# Altium PCB IR_ToF_Module.PcbDoc
Units mm, origin at the board's own origin, x right, y up, seen from the top; angles counter-clockwise.
Board outline 30 x 18.5 mm, 2 copper layers (Top Layer, Bottom Layer); 18 components, 14 nets, 95 pads, 46 vias.
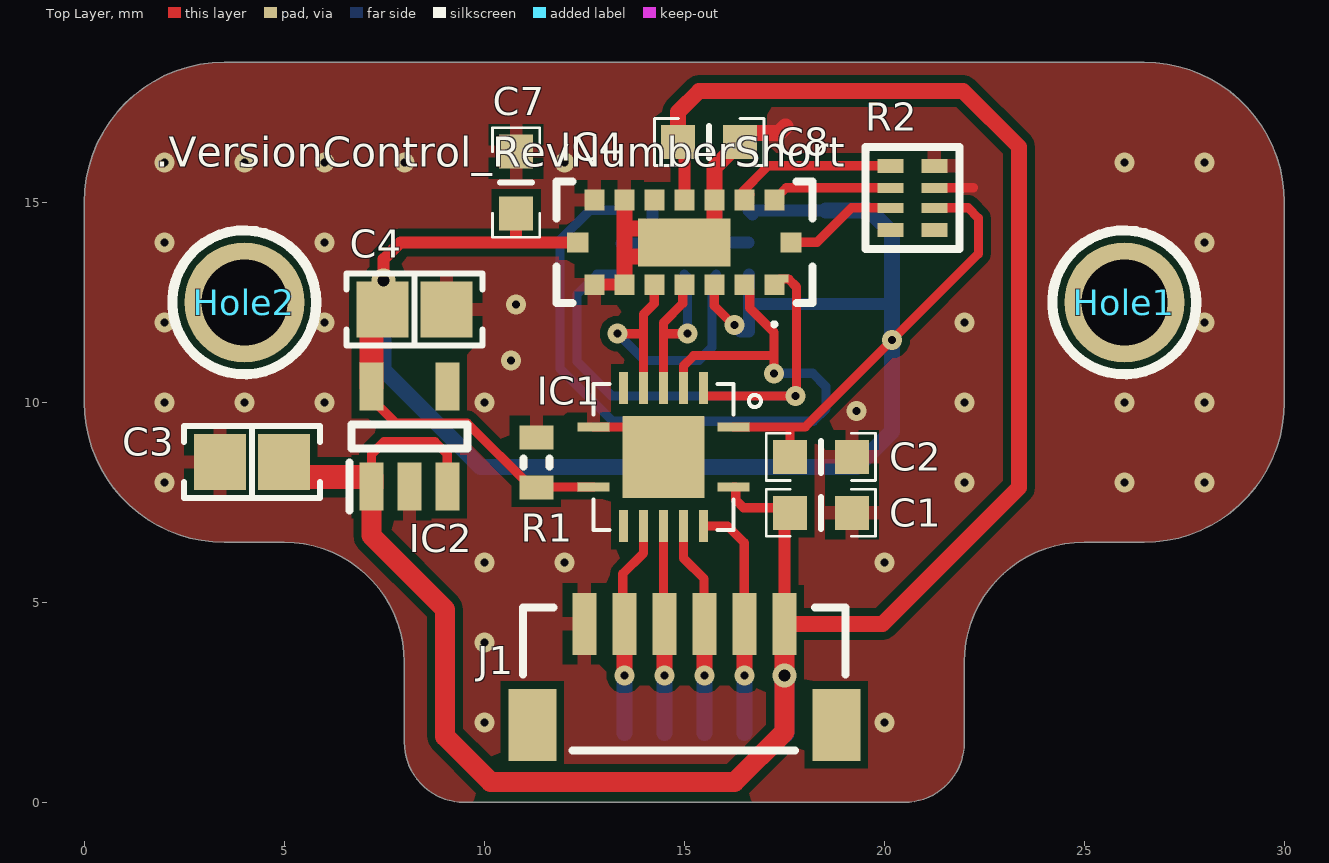
[diagram p0: Top Layer view]
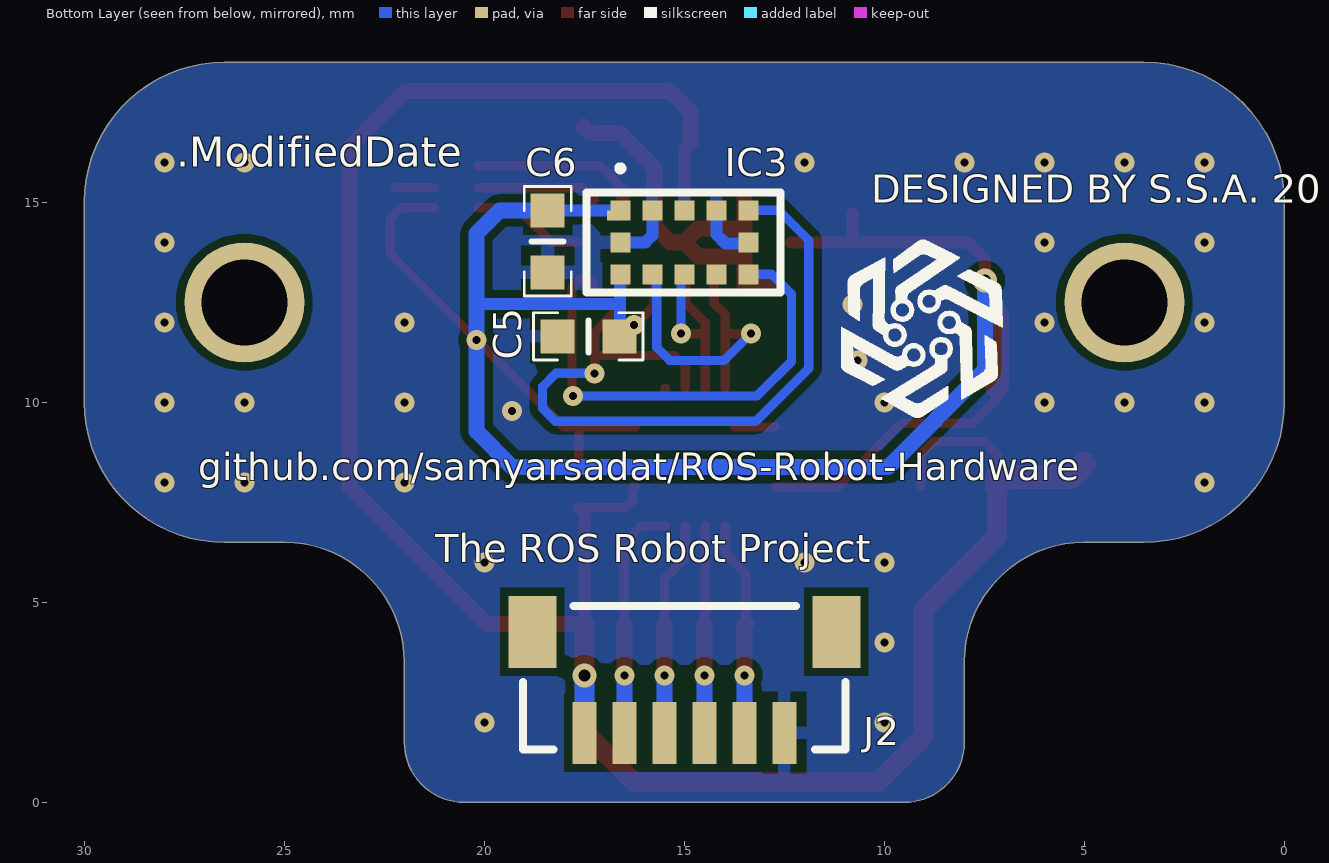
[diagram p1: Bottom Layer view, seen from below]
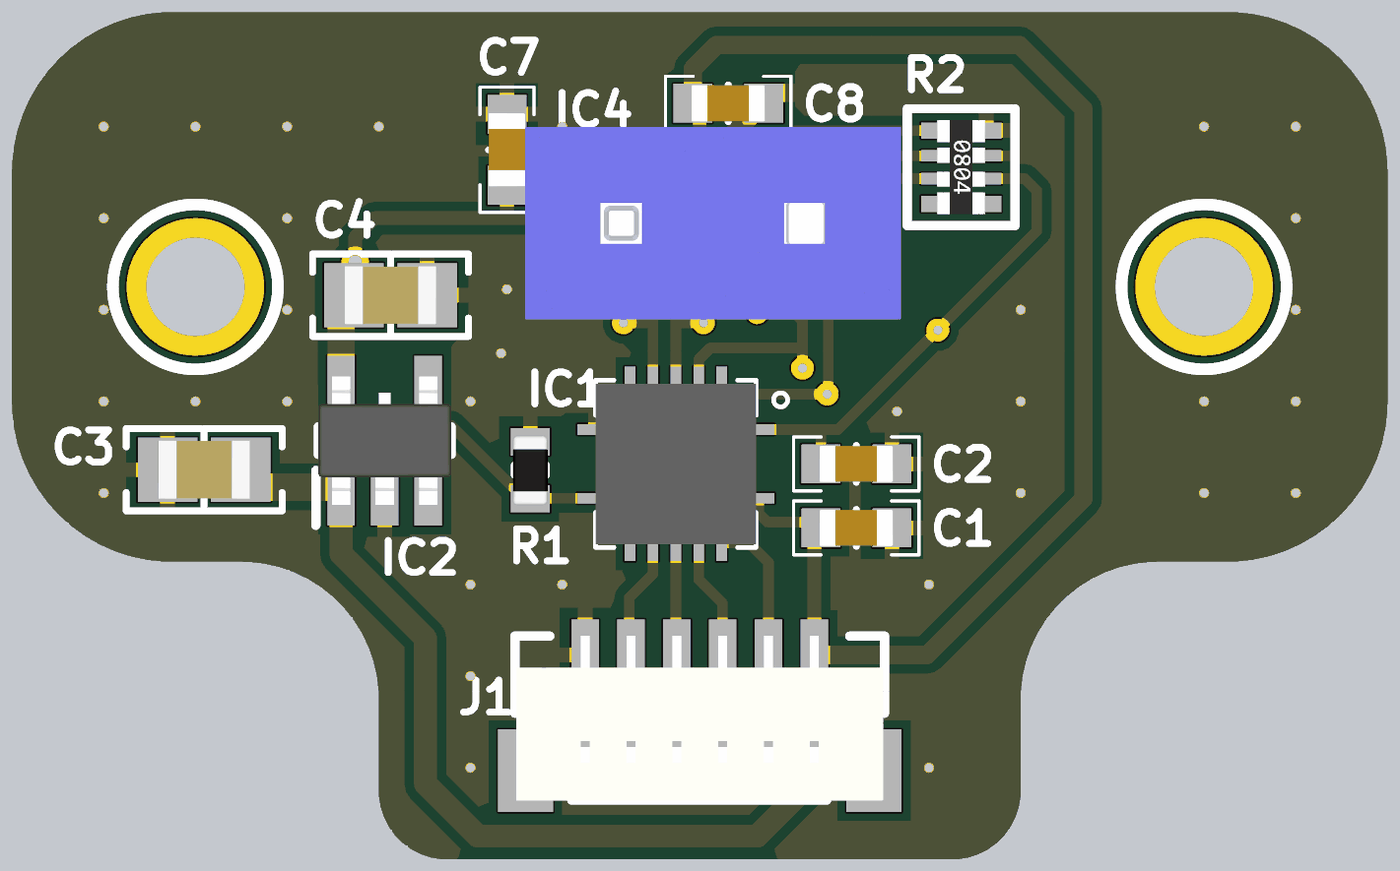
[diagram p2: 3D render of the assembled board from above, using the file's embedded part models]
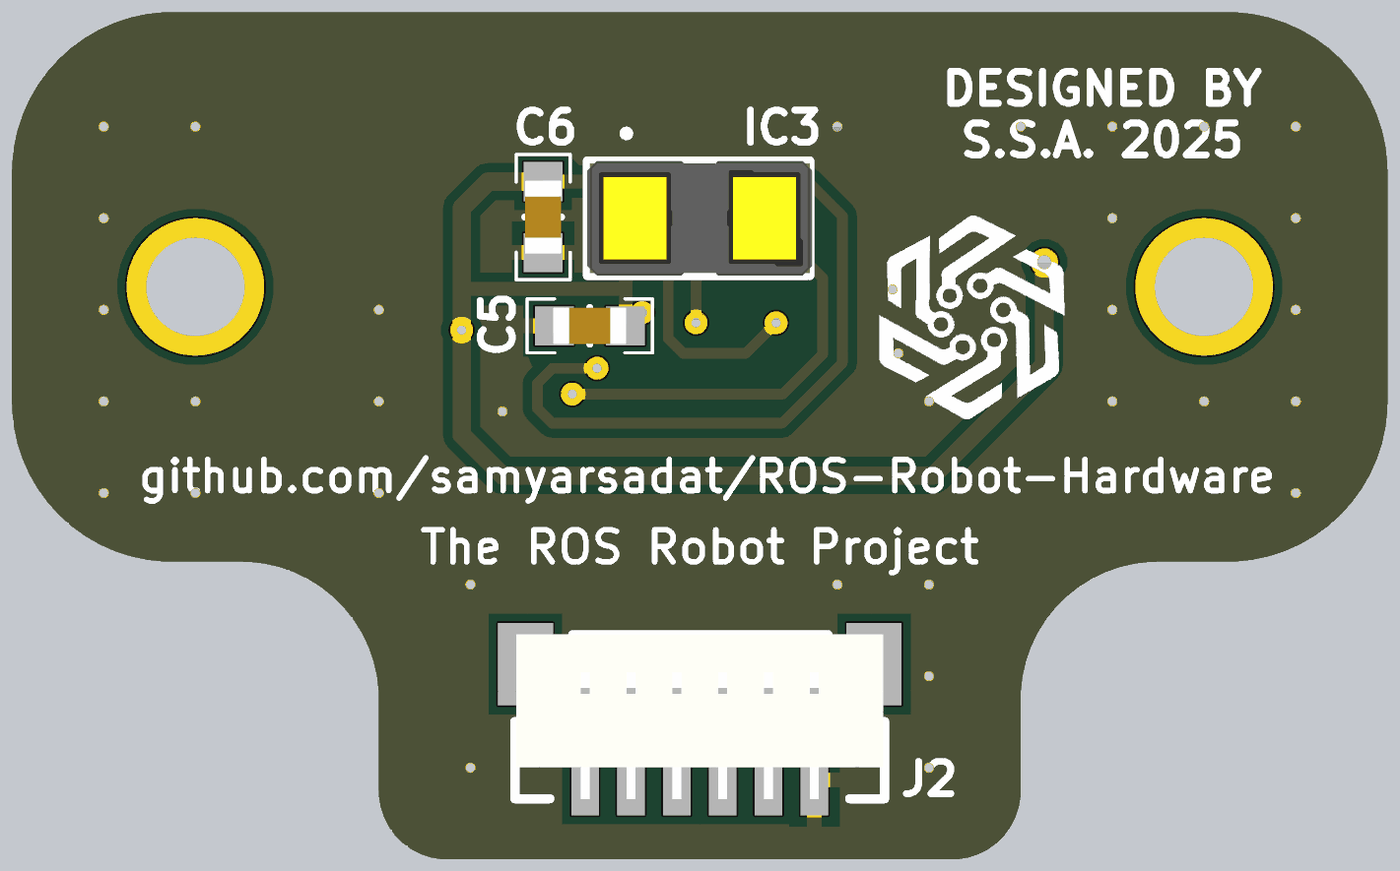
[diagram p3: 3D render of the assembled board from below, using the file's embedded part models]

## Layer stack, top to bottom
Top Solder: solder mask 0.0102, Solder Resist, Dk 3.5
Top Layer: signal copper 0.0356
Dielectric 1: dielectric 0.32, FR-4, Dk 4.8
Bottom Layer: signal copper 0.0356
Bottom Solder: solder mask 0.0102, Solder Resist, Dk 3.5

## Board outline
5,6.5 cw(c5,3.5) 8,3.5 8,1.5 ccw(c9.5,1.5) 9.5,0 20.5,0 ccw(c20.5,1.5) 22,1.5 22,3.5 cw(c25,3.5) 25,6.5 26.5,6.5 ccw(c26.5,10) 30,10 30,15 ccw(c26.5,15) 26.5,18.5 3.5,18.5 ccw(c3.5,15) 0,15 0,10 ccw(c3.5,10) 3.5,6.5

## Design rules (kind name [scope] priority, off if disabled: settings)
BoardOutlineClearance [All] p1: gap=0.2 ignorepadtopadclearanceinfootprint=FALSE except(0: Fill-OutlineEdge Fill-CavityEdge Fill-CutoutEdge Fill-SplitBarrior Fill-SplitContinuation Poly-OutlineEdge Poly-CavityEdge Poly-CutoutEdge Poly-SplitBarrior Poly-SplitContinuation Region-OutlineEdge Region-CavityEdge Region-CutoutEdge Region-SplitBarrior Region-SplitContinuation; 0.15: Text-OutlineEdge Text-CavityEdge Text-CutoutEdge Text-SplitBarrior Text-SplitContinuation)
Clearance "Stitching GND" [IsStitchingVia and InNet('GND') vs (IsVia and (Not IsStitchingVia)) Or IsPad] p1: gap=0.2 ignorepadtopadclearanceinfootprint=FALSE except(0.28: Arc-Hole Track-Hole)
Clearance [All] p2: gap=0.2 ignorepadtopadclearanceinfootprint=FALSE except(0.28: Arc-Hole Track-Hole)
DiffPairsRouting [All] p1: maxlimit=0.254 minlimit=0.254 mostfreqgap=0.254 toplayer_minwidth=0.381 toplayer_maxwidth=0.5 toplayer_prefwidth=0.4 bottomlayer_minwidth=0.381 bottomlayer_maxwidth=0.5 bottomlayer_prefwidth=0.4 maxuncoupledlength=12.7
HoleSize [All] p1: absolutevalues=TRUE maxlimit=6 minlimit=0.15 maxpercent=80.000 minpercent=20.000
HoleToHoleClearance [All] p1: gap=0.2 allowstackedmicrovias=TRUE
MinimumAnnularRing MinimumViaAnnularRing [IsVia] p1: minimumring=0.15
MinimumAnnularRing [All] p2: minimumring=0.2
MinimumSolderMaskSliver [All] p1: minsoldermaskwidth=0.1
PlaneConnect [All] p1: planeconnectstyle=Relief reliefexpansion=0.508 reliefentries=4 reliefconductorwidth=0.32 reliefairgap=0.254
PolygonConnect GNDStitchingDirect [InNet('GND')] p1: thpad.connectstyle=Relief thpad.reliefconductorwidth=0.32 thpad.reliefentries=4 thpad.polygonreliefangle="90 Angle" thpad.airgapwidth=0.254 thpad.conductorbypadedge=TRUE thpad.mindistance=0.381 thpad.enablemindistance=FALSE smdpad.connectstyle=Relief smdpad.reliefconductorwidth=0.32 smdpad.reliefentries=4 smdpad.polygonreliefangle="90 Angle" smdpad.airgapwidth=0.254 smdpad.conductorbypadedge=TRUE smdpad.mindistance=0.381 smdpad.enablemindistance=FALSE via.connectstyle=Direct via.reliefconductorwidth=0.254 via.reliefentries=4 via.polygonreliefangle="90 Angle" via.airgapwidth=0.254
PolygonConnect [All] p2: connectstyle=Relief reliefconductorwidth=0.32 reliefentries=4 polygonreliefangle="90 Angle" conductorbypadedge=TRUE mindistance=0.381 enablemindistance=FALSE airgapwidth=0.254
RoutingVias [All] p1: holewidth=0.4 width=0.8 viastyle="Through Hole" minholewidth=0.2 minwidth=0.5 maxholewidth=0.8 maxwidth=1.5
SilkToSilkClearance [All] p1: silktosilkclearance=0.1
SilkToSolderMaskClearance [IsPad] p1: minsilkscreentomaskgap=0.05 clearancetoexposedcopper=TRUE
SolderMaskExpansion [All] p1: expansion=0.04 istentingtop=FALSE
SupplyNets "Schematic Supply Nets_4" [InNet('+3V3')] p1: voltage=3.300
SupplyNets "Schematic Supply Nets_3" [InNet('+LV8')] p2: voltage=2.800
SupplyNets "Schematic Supply Nets_1" [InNet('GND')] p3: voltage=0.000
UnRoutedNet [All] p1: checkbadconnections=TRUE
Width [All] p1: maxlimit=1.4 minlimit=0.23 preferedwidth=0.3
22 further rules are at their usual default settings.

## Classes and differential pairs
component class VL53L_SZ: C5 C6 IC3
component class VL53L8CX: C7 C8 IC4 R2
component class IR_ToF_Module: C1 C2 C3 C4 Hole1 Hole2 IC1 IC2 J1 J2 R1

## Components (designator, comment, footprint, x,y, rotation, side; value= is the part's Value field where it differs from the comment)
C1 "100nF" CAP_SMD_603 18.415,7.239 r180 top
C2 "100nF" CAP_SMD_603 18.415,8.636 r180 top
C3 "10uF" "CAP 0805_2012" 4.191,8.509 r180 top
C4 "10uF" "CAP 0805_2012" 8.255,12.319 r0 top
C5 "100nF" CAP_SMD_603 17.399,11.65 r180 bottom
C6 "100nF" CAP_SMD_603 18.415,14.024 r270 bottom
C7 "100nF" CAP_SMD_603 10.795,15.494 r90 top
C8 "470nF" CAP_SMD_603 15.621,16.51 r180 top
Hole1 "Hole" Hole_2mm 26,12.5 r0 top locked
Hole2 "Hole" Hole_2mm 4,12.5 r0 top locked
IC1 "TXS0104ERGYR" RGY(S-PVQFN-N14) 14.478,8.636 r180 top
IC2 "TPS7A2028PDBVR" SOT95P280X145-5N 8.128,9.144 r90 top
IC3 "VL53L1X" VL53L1X 15,14 r90 bottom locked
IC4 "VL53L8CXV0GC_1" VL53L8CXV0GC1 15,14 r90 top locked
J1 "BM06B-SRSS-TB(LF)(SN)" "JST BM06B-SRSS-TB" 15,3.2 r180 top locked
J2 "BM06B-SRSS-TB(LF)(SN)" "JST BM06B-SRSS-TB" 15,3 r180 bottom
R1 "47k" RES_0603 11.303,7.874 r90 top
R2 "YC124-JR-0747KL" "RESNET 0804-8 CONVEX" 20.701,15.113 r180 top

## Footprints (in the part's own frame and the unit in brackets; to place one, negate y for a bottom-side part, rotate by r counter-clockwise, add the part's x,y. Pads: shape width x height; smd on the part's side, far side on the other; paste and mask are expansions set on the pad)
"CAP 0805_2012" [mm] "Chip Capacitor, 2-Leads, Body 2.00x1.20mm, IPC Medium Density"
  rect 1.3x1.4 smd: 1(-0.8,0) 2(0.8,0)
  silkscreen extent -1.7,-0.9 1.7,0.9, body extent -1,-0.64 1,0.64, height 1.26
CAP_SMD_603 [mm]
  rect 0.85x0.85 smd: 1(-0.775,0) 2(0.775,0)
  silkscreen extent -1.37,-0.59 1.37,0.59, body extent -0.8,-0.4 0.8,0.4, height 0.9
Hole_2mm [mm]
  round 3 hole 2.15: 1(0,0)
  silkscreen extent -1.8,-1.8 1.8,1.8
"JST BM06B-SRSS-TB" [mm] "1.0mm pitch/Disconnectable Crimp style connector"
  rect 0.6x1.55 smd: 1(-2.5,-1.262) 2(-1.5,-1.262) 3(-0.5,-1.262) 4(0.5,-1.262) 5(1.5,-1.262) 6(2.5,-1.262)
  rect 1.2x1.8 smd: M(-3.8,1.262) M(3.8,1.262)
  silkscreen extent -4.03,-1.68 4.03,1.91, body extent -4,-1.69 4,1.91, height 4.32
RES_0603 [mm]
  rect 0.6x0.85 smd: 1(0,0) 2(1.244,0)
  silkscreen extent 0.52,-0.33 0.72,0.33, body extent -0.14,-0.38 1.38,0.38, height 0.45
"RESNET 0804-8 CONVEX" [mm] "4 resistor 2.0x1.0mm, 0.65mm high"
  rect 0.65x0.35 smd: 1(-0.55,0.8) 4(-0.55,-0.8) 5(0.55,-0.8) 8(0.55,0.8)
  rect 0.65x0.25 smd: 2(-0.55,0.25) 3(-0.55,-0.25) 6(0.55,-0.25) 7(0.55,0.25)
  silkscreen extent -1.17,-1.28 1.17,1.28, body extent -0.53,-1.02 0.53,1.03, height 0.56
RGY(S-PVQFN-N14) [mm]
  rect 0.8x0.23 smd: 1(-1.75,-0.75) 7(1.75,-0.75) 8(1.75,0.75) 14(-1.75,0.75)
  rect 0.23x0.8 smd: 2(-1,-1.725) 3(-0.5,-1.725) 4(0,-1.725) 5(0.5,-1.725) 6(1,-1.725) 9(1,1.725) 10(0.5,1.725) 11(0,1.725) 12(-0.5,1.725) 13(-1,1.725)
  rect 2.05x2.05 smd: 15(0,0)
  silkscreen extent -2.44,-1.83 1.75,1.83, body extent -1.75,-1.75 1.75,1.75, height 0.97
SOT95P280X145-5N [mm]
  rect 1.2x0.6 smd: 1(-1.25,0.95) 2(-1.25,0) 3(-1.25,-0.95) 4(1.25,-0.95) 5(1.25,0.95)
  silkscreen extent -1.85,-1.45 0.3,1.5, body extent -1.4,-1.45 1.4,1.45, height 1.2
VL53L1X [mm]
  rect 0.25x0.08 smd: 1(0.675,1.89)
  rect 0.5x0.5 smd: 1(0.8,1.6) 2(0.8,0.8) 3(0.8,0) 4(0.8,-0.8) 5(0.8,-1.6) 6(0,-1.6) 7(-0.8,-1.6) 8(-0.8,-0.8) 9(-0.8,0) 10(-0.8,0.8) 11(-0.8,1.6) 12(0,1.6)
  silkscreen extent -1.25,-2.4 1.9,2.45, body extent -1.25,-2.45 1.25,2.45, height 1.56
VL53L8CXV0GC1 [mm]
  rect 0.515x0.5 smd: A1(-1.058,-2.25) A2(-1.058,-1.5) A3(-1.058,-0.75) A4(-1.058,0) A5(-1.058,0.75) A6(-1.058,1.5) A7(-1.058,2.25) C1(1.058,-2.25) C2(1.058,-1.5) C3(1.058,-0.75) C4(1.058,0) C5(1.058,0.75) C6(1.058,1.5) C7(1.058,2.25)
  rect 0.2x0.1 smd: A1(-0.9,-2.55)
  rect 0.5x0.535 smd: B1(0,-2.668) B7(0,2.668)
  rect 1.2x2.316 smd: B4(0,0)
  silkscreen extent -2.1,-3.2 1.52,3.2, body extent -2.21,-4.39 1.99,3.81, height 4.75

## Part data
C1 C2 C5 C6 C7 C8: library part "Non-polar Capacitor", "Generic Ceramic Capacitor", Voltage=6.3V
C3 C4: library part CL21A106KOQNNNE, "CAP CER 10UF 16V X5R 0805", Capacitance="10 µF", Device Package="0805 (2012 Metric)", Manufacturer="Samsung Electro-Mechanics", Operating Temperature="-55°C ~ 85°C", Supplier Part Number 1=1276-1096-1-ND, Temperature Coefficient=X5R, Tolerance=±10%, Voltage - Rated=16V, Applications="General Purpose", ComponentLink1Description=Datasheet, ComponentLink1URL=http://www.samsungsem.com/kr/support/product-search/mlcc/CL21A106KOQNNNE.jsp, ComponentLink2Description="DigiKey Link", ComponentLink2URL=https://www.digikey.com/en/products/detail/samsung-electro-mechanics/CL21A106KOQNNNE/3886754, LastUpdated="2/9/2024 8:15:37 PM", Lifecycle Status=Active, Minimum Order=1, Mounting Type="Surface Mount, MLCC", Package / Case="0805 (2012 Metric)", Packaging=TapeAndReel, Part Number=CL21A106KOQNNNE, Part Status=Active, PartId=14297, Price=0.01, Series=CL, Size / Dimension="0.079\" L x 0.049\" W (2.00mm x 1.25mm)", Supplier 1=DigiKey, Thickness (Max)="0.055\" (1.40mm)"
IC1: "Integrated Circuit", Manufacturer_Name="Texas Instruments", Mouser Part Number=595-TXS0104ERGYR, Arrow Part Number=TXS0104ERGYR, Arrow Price/Stock=https://www.arrow.com/en/products/txs0104ergyr/texas-instruments?region=nac, Datasheet Link=http://www.ti.com/general/docs/lit/getliterature.tsp?genericPartNumber=TXS0104E&&fileType=pdf, Manufacturer_Part_Number=TXS0104ERGYR, Mouser Price/Stock=https://www.mouser.co.uk/ProductDetail/Texas-Instruments/TXS0104ERGYR?qs=7kv20MEVUliW1hYoQAOHUw%3D%3D
IC2: "Integrated Circuit", Manufacturer_Name="Texas Instruments", Mouser Part Number=595-TPS7A2028PDBVR, Arrow Part Number=TPS7A2028PDBVR, Arrow Price/Stock=https://www.arrow.com/en/products/tps7a2028pdbvr/texas-instruments?utm_currency=USD&region=europe, Datasheet Link=https://www.ti.com/lit/ds/symlink/tps7a20.pdf?ts=1609147815506&ref_url=https%253A%252F%252Fwww.mouser.in%252F, Height=1.45mm, Manufacturer_Part_Number=TPS7A2028PDBVR, Mouser Price/Stock=https://www.mouser.co.uk/ProductDetail/Texas-Instruments/TPS7A2028PDBVR?qs=hd1VzrDQEGggpQylpM260g%3D%3D
IC3: "Integrated Circuit", Manufacturer_Name=STMicroelectronics, Datasheet Link=https://www.st.com/resource/en/datasheet/vl53l1x.pdf, Height=1.6mm, Manufacturer_Part_Number=VL53L1X
IC4: "Integrated Circuit", Arrow Part Number=VL53L8CXV0GC/1, Manufacturer_Name=STMicroelectronics, Mouser Part Number=511-VL53L8CXV0GC/1, Arrow Price/Stock=https://www.arrow.com/en/products/vl53l8cxv0gc1/stmicroelectronics?utm_currency=USD&region=europe, Datasheet Link=https://www.st.com/resource/en/datasheet/vl53l8cx.pdf, Manufacturer_Part_Number=VL53L8CXV0GC/1, Mouser Price/Stock=https://www.mouser.co.uk/ProductDetail/STMicroelectronics/VL53L8CXV0GC-1?qs=T%252BzbugeAwjhc9idkQC%252BF8g%3D%3D
J1 J2: "CONN HEADER SMD 6POS 1MM", Current Rating (Amps)=0.7A, Insulation Color=Natural, Manufacturer="JST Sales America Inc.", Material Flammability Rating="UL94 V-0", Operating Temperature="-25°C ~ 85°C", Supplier Part Number 1=455-1792-1-ND, Voltage Rating=50V, ComponentLink1Description=Datasheet, ComponentLink1URL=http://www.jst-mfg.com/product/pdf/eng/eSH.pdf, ComponentLink2Description="DigiKey Link", ComponentLink2URL=http://digikey.com/product-detail/en/jst-sales-america-inc/BM06B-SRSS-TB-LF-SN/455-1792-1-ND/926863, Connector Type=Header, Contact Finish - Mating=Tin, Contact Finish - Post=Tin, Contact Material="Copper Alloy", Contact Shape=Square, Contact Type="Male Pin", Fastening Type=Push-Pull, Features="Solder Retention", Insulation Height="0.167\" (4.25mm)", Insulation Material="Polyamide (PA), Nylon", LastUpdated="1/12/2020 10:14:30 PM", Lifecycle Status=Active, Minimum Order=1, Mounting Type="Surface Mount", Number of Positions=6, Number of Positions Loaded=All, Number of Rows=1, Packaging=TapeAndReel, Part Number=BM06B-SRSS-TB(LF)(SN), Part Status=Active, PartId=20, Pitch - Mating="0.039\" (1.00mm)", Price=0.38, Series=SR, Shrouding="Shrouded - 4 Wall", Style="Board to Cable/Wire", Supplier 1=DigiKey, System=Connector, Termination=Solder
R1: library part Resistor, "Generic Resistor", Power=1/8W
R2: "RES ARRAY 4 RES 47K OHM 0804", Manufacturer=Yageo, Number of Resistors=4, Operating Temperature="-55°C ~ 155°C", Package / Case="0804, Convex, Long Side Terminals", Power Per Element=62.5mW, Resistance (Ohms)=47k, Supplier Part Number 1=YC124J-47KCT-ND, Temperature Coefficient=±200ppm/°C, Tolerance=±5%, Applications="DDRAM, SDRAM", Circuit Type=Isolated, ComponentLink1Description=Datasheet, ComponentLink1URL=https://www.yageo.com/upload/media/product/productsearch/datasheet/rchip/PYu-YC_TC_group_51_RoHS_L_9.pdf, ComponentLink2Description="DigiKey Link", ComponentLink2URL=https://www.digikey.com/en/products/detail/yageo/YC124-JR-0747KL/1005035, Height - Seated (Max)="0.022\" (0.55mm)", LastUpdated="6/3/2024 8:05:56 PM", Lifecycle Status=Active, Minimum Order=1, Mounting Type="Surface Mount", Number of Pins=8, Packaging=TapeAndReel, Part Number=YC124-JR-0747KL, Part Status=Active, PartId=481, Price=0.01, Series=YC124, Size / Dimension="0.079\" L x 0.039\" W (2.00mm x 1.00mm)", Supplier 1=DigiKey

## Via types
v1: diameter 0.5, hole 0.2, Top Layer to Bottom Layer, tented both sides, 34 vias
v2: diameter 0.5, hole 0.2, Top Layer to Bottom Layer, 10 vias
v3: diameter 0.6, hole 0.3, Top Layer to Bottom Layer, 2 vias

## Nets (pads, with @x,y where several pads share a name; then routed paths per layer and width w, separated by ;. In a path a pad name is that pad's centre, name@x,y a point inside that pad or via, vN(x,y) a via of type N, cw(c..) or ccw(c..) an arc to the next point about the centre after c; other vN are vias at no path point)
+3V3: C1.2 C3.1 C8.2 IC1.14 IC2.1 IC2.3 IC4.C4 J1.1 J2.1 | length 59.1
  Top Layer w0.23: IC2.1 7.18,7.896 7.18,8.704 7.493,9.017 8.763,9.017 9.076,8.704 9.076,7.896 IC2.3 ; IC1.14 16.284,7.886 16.284,7.561 16.478,7.366 C1.2@17.64,7.366
  Top Layer w0.3: C8.2@14.859,16.503 15,16.362 IC4.C4 ; J1.1 17.5,7.226 C1.2@17.64,7.366
  Top Layer w0.4: C8.2 14.846,17.259 15.367,17.78 21.971,17.78 23.368,16.383 23.368,7.874 19.957,4.463 J1.1
  Top Layer w0.5: IC2.1 7.178,6.665 9.017,4.826 9.017,1.651 10.16,0.508 16.256,0.508 17.5,1.752 v3(17.5,3.175) J1.1@17.5,4.441
  Top Layer w0.6: C3.1@4.991,8.459 5.322,8.128 7.178,8.128 IC2.1
  Bottom Layer w0.5: J2.1 v3(17.5,3.175)
+LV8: C2.2 C4.1 C5.2 C6.1 C7.1 IC1.1 IC1.8 IC2.5 IC3.1 IC3.11 IC4.A3 IC4.B7 R1.1 R2.2 | length 58.4
  Top Layer w0.23: IC2.5 7.178,10.094 7.363,9.909 7.793,9.479 9.573,9.479 11.166,7.886 IC1.8 ; IC2.5@7.178,10.949 IC2.5@7.305,10.821 ; IC4.A3 15.75,12.413 16.225,11.938 v2(16.255,11.938) ; IC1.1 17.64,9.386 ; C2.2 17.64,9.386 ; R2.2 22.094,14.863 22.352,14.605 22.352,13.716 18.022,9.386 17.64,9.386
  Top Layer w0.3: C4.1 7.484,12.348 v3(7.484,13.041) 7.484,13.58 7.904,14 10.795,14 ; C7.1 10.795,14 ; IC4.B7 10.795,14
  Top Layer w0.6: IC2.5 7.178,10.949 C4.1@7.178,12.169
  Bottom Layer w0.3: v2(16.255,11.938) 16.255,11.926 16.408,11.773 16.612,11.773 16.612,12.453 ; IC3.11@16.612,13.2 16.612,12.453 ; IC3.1@16.7,14.7 16.6,14.8 16.89,14.8 C6.1 C6.1@18.542,14.799 ; 20.193,12.453 16.612,12.453
  Bottom Layer w0.4: v3(7.484,13.041) 7.484,10.804 9.906,8.382 19.304,8.382 20.193,9.271 v2(20.193,11.557) 20.193,12.453 20.193,14.224 19.618,14.799 C6.1@18.542,14.799
GND: C1.1 C2.1 C3.2 C4.2 C5.1 C6.2 C7.2 C8.1 IC1.7 IC1.15 IC2.2 IC3.2 IC3.3 IC3.4 IC3.6 IC3.12 IC4.A6 IC4.A7 IC4.B4 IC4.C3 IC4.C6 IC4.C7 J1.6 J2.6 R1.2 R2.3 R2.4 | length 15.7
  Top Layer w0.23: IC1.7 IC1.15@13.728,9.386 ; R2.3 22.221,15.363 22.225,15.367
  Top Layer w0.3: IC4.A7 IC4.A6
  Top Layer w0.4: IC4.A6 13.5,13.647 ; IC4.C6 13.5,14.351 ; 17.526,16.891 17.37,16.735 16.621,16.735 C8.1 15.75,15.864 IC4.C3 15.75,14.4 15.35,14 IC4.B4 ; 13.5,13.647 13.5,14.351 ; 13.5,13.647 14.647,13.647 IC4.B4 ; 13.5,14.351 14.649,14.351 IC4.B4
  Bottom Layer w0.3: IC3.6@13.43,13.97 13.97,13.97 14.2,14.2 IC3.4 ; IC3.2 15.8,14.176 15.976,14 IC3.12
  other v1: 10,2 20,2 10,4 10,6 12,6 20,6 2,8 22,8 26,8 28,8 19.304,9.779 2,10 4,10 6,10 10,10 22,10 26,10 28,10 10.668,11.049 2,12 6,12 22,12 28,12 10.795,12.446 2,14 6,14 28,14 2,16 4,16 6,16 8,16 12,16 26,16 28,16
I2C_LV8.SCL: IC1.5 IC3.10 IC4.A5 | length 8
  Top Layer w0.23: v2(13.335,11.716) 13.978,11.716 ; IC1.5 13.978,11.716 ; IC4.A5 14.25,12.472 13.978,12.2 13.978,11.716
  Bottom Layer w0.23: v2(13.335,11.716) 14.002,11.049 15.367,11.049 15.69,11.372 15.69,11.704 ; 15.69,11.704 15.69,12.172 ; 15.69,12.172 15.69,13.09 IC3.10
I2C_LV8.SDA: IC1.4 IC3.9 IC4.A4 | length 4.9
  Top Layer w0.23: IC1.4 14.478,11.716 ; IC4.A4 14.963,12.905 14.963,12.474 14.478,11.989 14.478,11.716 ; v2(15.081,11.716) 14.478,11.716
  Bottom Layer w0.23: IC3.9 15.081,13.119 v2(15.081,11.716)
INT: IC1.13 J1.2 J2.2 | length 6.1
  Top Layer w0.23: IC1.13 16.076,6.911 16.5,6.487 J1.2@16.5,4.262
  Top Layer w0.4: v2(16.5,3.175) J1.2@16.5,4.441
  Bottom Layer w0.4: J2.2 v2(16.5,3.175)
INT_LV8: IC1.2 IC3.7 IC4.A1 | length 14.7
  Top Layer w0.23: IC1.2 15.478,10.16 v2(17.78,10.16) 17.806,10.186 17.806,12.884 17.608,13.081 17.385,13.081 17.25,12.946 IC4.A1@17.25,12.942
  Bottom Layer w0.23: IC3.7 12.819,13.2 12.319,12.7 12.319,11.022 13.181,10.16 v2(17.78,10.16)
NetIC4_B1: IC4.B1 R2.7 | length 2.8
  Top Layer w0.23: IC4.B1 18.318,14 19.181,14.863 R2.7
NetIC4_C1: IC4.C1 R2.6 | length 3
  Top Layer w0.23: IC4.C1 17.25,15.065 17.548,15.363 R2.6
NetIC4_C2: IC4.C2 R2.5 | length 4.2
  Top Layer w0.23: IC4.C2@16.406,15.217 17.102,15.913 R2.5 ; IC4.C2 IC4.C2@16.635,15.193
SCL: IC1.10 J1.5 J2.5 | length 5.6
  Top Layer w0.23: J1.5@13.5,4.262 13.462,4.3 13.462,4.463 13.462,5.715 13.978,6.231 IC1.10
  Top Layer w0.4: J1.5@13.462,4.463 13.5,4.424 v2(13.5,3.175)
  Bottom Layer w0.4: J2.5 v2(13.5,3.175)
SDA: IC1.11 J1.4 J2.4 | length 5.2
  Top Layer w0.23: J1.4@14.478,4.463 IC1.11
  Top Layer w0.3: J1.4@14.478,4.463 J1.4@14.5,4.441
  Top Layer w0.4: v2(14.5,3.175) J1.4@14.5,4.441
  Bottom Layer w0.4: J2.4 v2(14.5,3.175)
XSHUT: IC1.12 J1.3 J2.3 | length 5.6
  Top Layer w0.23: IC1.12 14.978,6.104 15.494,5.588 15.494,4.268 J1.3@15.5,4.262
  Top Layer w0.4: v2(15.5,3.175) J1.3@15.5,4.441
  Bottom Layer w0.4: J2.3 v2(15.5,3.175)
XSHUT_LV8: IC1.3 IC3.5 IC4.A2 | length 19.8
  Top Layer w0.23: IC1.3 14.978,10.914 15.232,11.168 17.241,11.168 ; IC4.A2 16.635,12.807 16.635,12.357 17.241,11.751 17.241,11.168 ; v2(17.241,10.725) 17.241,11.168
  Bottom Layer w0.23: IC3.5 12.641,14.8 11.889,14.048 11.889,10.844 13.208,9.525 18.222,9.525 18.542,9.845 18.542,10.392 18.209,10.725 v2(17.241,10.725)
pads on no net: Hole1.1 Hole2.1 IC1.6 IC1.9 IC2.4 IC3.8 IC4.C5 J1.M J2.M R2.1 R2.8

## Polygon pours and split planes (outlines as drawn)
GND on Top Layer "GND_L01_P001" (solid, remove dead copper, pour order 1): 5,6.5 cw(c5,3.5) 8,3.5 8,1.5 ccw(c9.5,1.5) 9.5,0 20.5,0 ccw(c20.5,1.5) 22,1.5 22,3.5 cw(c25,3.5) 25,6.5 26.5,6.5 ccw(c26.5,10) 30,10 30,15 ccw(c26.5,15) 26.5,18.5 3.5,18.5 ccw(c3.5,15) 0,15 0,10 ccw(c3.5,10) 3.5,6.5
GND on Bottom Layer "GND_L02_P000" (solid, remove dead copper, pour order 0): 5,6.5 cw(c5,3.5) 8,3.5 8,1.5 ccw(c9.5,1.5) 9.5,0 20.5,0 ccw(c20.5,1.5) 22,1.5 22,3.5 cw(c25,3.5) 25,6.5 26.5,6.5 ccw(c26.5,10) 30,10 30,15 ccw(c26.5,15) 26.5,18.5 3.5,18.5 ccw(c3.5,15) 0,15 0,10 ccw(c3.5,10) 3.5,6.5

## Silkscreen, mask and mechanical layers (free items; w line width, h text height)
Top Overlay:
  text ".VersionControl_RevNumberShort" at 1.791,15.888 h0.75
Bottom Overlay:
  drawing of 6 lines, arcs and shapes, not listed
  text ".ModifiedDate" at 27.697,15.888 h0.75
  text "DESIGNED BY S.S.A. 2025" at 10.326,14.986 h0.7
  text "github.com/samyarsadat/ROS-Robot-Hardware" at 27.156,8.047 h0.68
  text "The ROS Robot Project" at 21.23,6 h0.7
Mechanical 1:
  the board outline again, w0.254